# Altium PCB base_power_assy PCB_20171028.PcbDoc
Units mm, origin at the board's own origin, x right, y up, seen from the top; angles counter-clockwise.
Board outline 30 x 27.45 mm, 2 copper layers (Top Layer, Bottom Layer), stack 1 mm thick; 17 components, 7 nets, 46 pads, 128 vias.
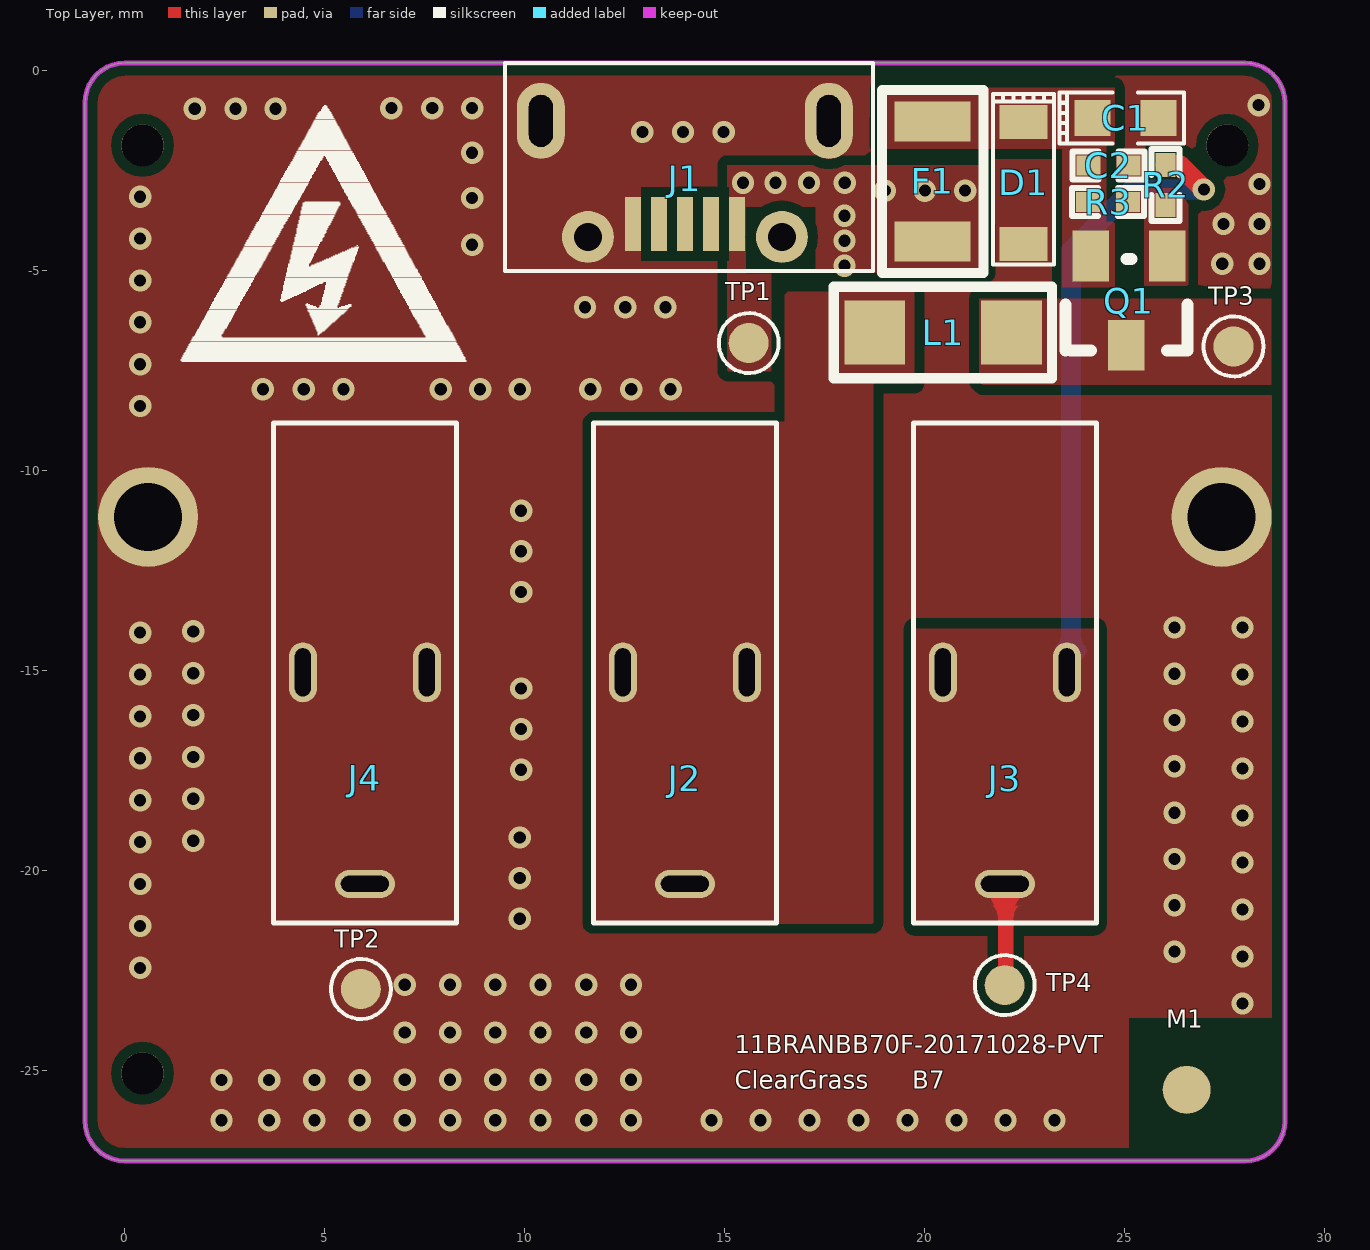
[diagram p0: Top Layer view]
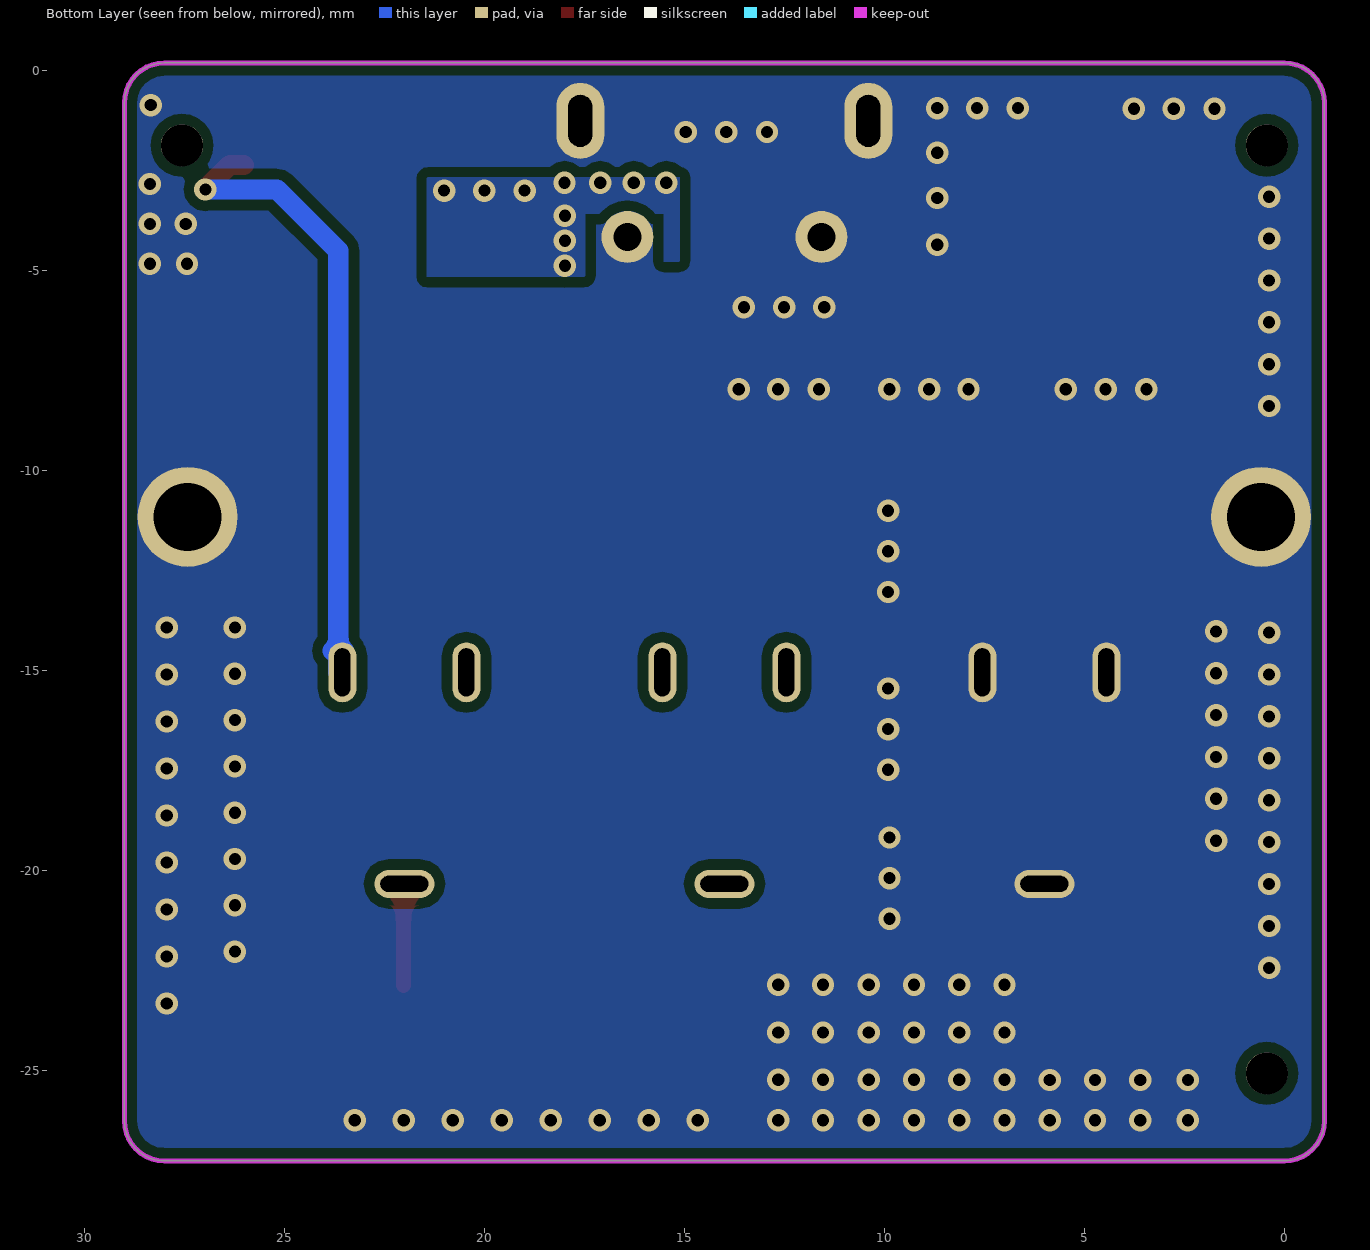
[diagram p1: Bottom Layer view, seen from below]

## Layer stack, top to bottom
Top Solder: solder mask 0.0102, Solder Resist, Dk 3.5
Top Layer: signal copper 0.0356
Dielectric1: core 0.929, FR-4, Dk 4.8
Bottom Layer: signal copper 0.0356
Bottom Solder: solder mask 0.0102, Solder Resist, Dk 3.5

## Board outline
-1,-26.25 ccw(c0,-26.25) 0,-27.25 28,-27.25 ccw(c28,-26.25) 29,-26.25 29,-0.8 ccw(c28,-0.8) 28,0.2 0,0.2 ccw(c0,-0.8) -1,-0.8

## Design rules (kind name [scope] priority, off if disabled: settings)
Clearance [All] p1: gap=0.254
HoleToHoleClearance [All] p1: gap=0 allowstackedmicrovias=TRUE
MinimumSolderMaskSliver [All] p1: minsoldermaskwidth=0
PolygonConnect [All] p1: connectstyle=Direct reliefconductorwidth=1.5 reliefentries=4 polygonreliefangle="90 Angle" airgapwidth=0.254
RoutingVias [All] p1: holewidth=0.711 width=1.27 viastyle="Through Hole" minholewidth=0.711 minwidth=1.27 maxholewidth=0.711 maxwidth=1.27
SilkToSilkClearance [All] p1: silktosilkclearance=0
SilkToSolderMaskClearance SilkscreenOverComponentPads [IsPad] p1: minsilkscreentomaskgap=0 clearancetoexposedcopper=TRUE
SolderMaskExpansion [All] p1: expansion=0.102
Width [All] p1: maxlimit=2.54 minlimit=0.254 preferedwidth=0.254
26 further rules are at their usual default settings.

## Components (designator, comment, footprint, x,y, rotation, side; value= is the part's Value field where it differs from the comment)
C1 "10uF/10V" TAN-0603 25.012,-1.176 r0 top
C2 "0.1uF" 0402C 24.589,-2.361 r180 top
D1 "RSA5M" PDMU 22.465,-2.802 r0 top
F1 "2A" 1206-FUSE 20.193,-2.764 r270 top
J1 "MICRO_USB_B" MICRO-USB-乐沪 14,-2.7 r180 top locked
J2 "Coupler" "COUPLER - 1" 14,-17.73 r180 top locked
J3 "Coupler" "COUPLER - 1" 22,-17.73 r180 top locked
J4 "Coupler" "COUPLER - 1" 6,-17.73 r180 top locked
L1 "B5H DC1206RA601H30T" 1206 20.455,-6.541 r0 top
M1 "MARK" "Mark Point" 26.543,-25.472 r0 top
Q1 "RRR030P03TL" TSMT3 25.101,-5.743 r180 top
R2 "1K/1%" 0402R 26.018,-2.85 r90 top
R3 "100K/1%" 0402R 24.582,-3.273 r0 top
TP1 "TEST" "Test Pad" 15.596,-6.803 r0 top
TP2 "TEST" "Test Pad" 5.898,-22.952 r90 top
TP3 "TEST" "Test Pad" 27.716,-6.888 r90 top
TP4 "TEST" "Test Pad" 21.995,-22.856 r90 top

## Footprints (in the part's own frame and the unit in brackets; to place one, negate y for a bottom-side part, rotate by r counter-clockwise, add the part's x,y. Pads: shape width x height; smd on the part's side, far side on the other; paste and mask are expansions set on the pad)
0402C [mm]
  rect 0.6x0.5 smd: 1(-0.5,0) 2(0.5,0)
  silkscreen extent -0.9,-0.35 0.9,0.35, body extent -0.51,-0.25 0.51,0.25, height 0.5
0402R [mm]
  rect 0.6x0.5 smd: 1(-0.5,0) 2(0.5,0)
  silkscreen extent -0.9,-0.35 0.9,0.35, body extent -0.51,-0.25 0.51,0.25, height 0.5
1206 [mm]
  rect 1.52x1.6 smd: 1(1.71,0) 2(-1.71,0)
  silkscreen extent -2.73,-1.14 2.73,1.14, body extent -2.57,-0.9 2.57,0.9, height 0.9
1206-FUSE [mm]
  rect 1x1.9 smd: 1(1.5,0) 2(-1.5,0)
  silkscreen extent -2.29,-1.27 2.29,1.27, body extent -2.43,-1.2 2.48,1.2, height 1.4
"COUPLER - 1" [mm]
  oval 0.7x1.5 hole 0.4 slot 1.2 at 90 deg: 1(-1.55,-2.695) 1(1.55,-2.695)
  oval 1.5x0.7 hole 0.4 slot 1.2 at 0 deg: 1(0,2.595)
  silkscreen extent -2.29,-8.92 2.29,3.58, body extent -2.33,-8.93 2.2,3.52, height 4.67
"Mark Point" [mm]
  round 1.2 smd: 4(0,0)
  round 2.4 on Top Solder: 5(0,0)
MICRO-USB-乐沪 [mm]
  rect 0.4x1.35 smd: 1(-1.3,1.125) 2(-0.65,1.125) 3(0,1.125) 4(0.65,1.125) 5(1.3,1.125)
  round 1.3 hole 0.7: 6(-2.425,1.45) 7(2.425,1.45)
  oval 1.2x1.9 hole 0.6 slot 1.3 at 90 deg: 8(-3.6,-1.45) 9(3.6,-1.45)
  silkscreen extent -4.7,-2.9 4.5,2.3, body extent -4.71,-4.34 4.46,1.9, height 1.85
PDMU [mm]
  rect 1.2x0.85 smd: 1(0,1.525) 2(0,-1.525)
  silkscreen extent -0.76,-2.03 0.76,2.22, body extent -0.7,-2.05 0.7,2.05, height 0.9
TAN-0603 [mm]
  rect 0.9x0.9 smd: 1(-0.826,0) 2(0.826,0)
  silkscreen extent -1.65,-0.64 1.46,0.64, body extent -1.38,-0.55 1.38,0.55, height 0.9
"Test Pad" [mm]
  round 1 smd: 1(0,0)
  silkscreen extent -0.75,-0.75 0.75,0.75, body extent -0.6,-0.6 0.6,0.6, height 0.1
TSMT3 [mil]
  rect 36x50 smd: 1(-37.5,-44) 2(37.5,-44) 3(2.5,44)
  silkscreen extent -58,-41 62,49, body extent -60,-73 60,73, height 39

## Part data
C1: library part Capacitor
D1: library part ESD_1, "厂?"
F1: library part FUSE2, "厂?"
J1: library part USB_
J2 J3 J4: "厂?"
L1: library part CHOKE, "厂?"
M1: library part PAD1, "None"
Q1: library part PMOS, "厂?"
R2 R3: library part RES, "厂家"
TP1 TP2 TP3 TP4: "Test Point"

## Free pads (board coordinates)
  round 1.05 hole 1.05 unplated mask+0: 0(0.44,-1.86) 3(0.44,-25.06) O(27.56,-1.86)
  round 2.5 hole 1.7: 1(0.58,-11.15) 2(27.42,-11.15)

## Via types
v1: diameter 0.559, hole 0.305, Top Layer to Bottom Layer, tented both sides, 128 vias

## Nets (pads, with @x,y where several pads share a name; then routed paths per layer and width w, separated by ;. In a path a pad name is that pad's centre, name@x,y a point inside that pad or via, vN(x,y) a via of type N, cw(c..) or ccw(c..) an arc to the next point about the centre after c; other vN are vias at no path point)
ADAPTER_5V: C1.1 C2.2 D1.1 F1.2 Q1.2 R3.1
GND: C1.2 C2.1 D1.2 J1.5 J1.6 J1.7 J1.8 J1.9 J4.1 pad.1 pad.2 TP2.1
  other v1: 2.413,-26.234 3.605,-26.234 4.736,-26.234 5.867,-26.234 6.998,-26.234 8.129,-26.234 9.26,-26.234 10.391,-26.234 11.535,-26.234 12.653,-26.234 14.665,-26.234 15.89,-26.234 17.115,-26.234 18.34,-26.234 19.565,-26.234 20.791,-26.234 22.016,-26.234 23.241,-26.234 2.413,-25.228 3.605,-25.228 4.736,-25.228 5.867,-25.228 6.998,-25.22 8.129,-25.22 9.26,-25.22 10.391,-25.22 11.535,-25.22 12.653,-25.22 6.998,-24.041 8.129,-24.041 9.26,-24.041 10.391,-24.041 11.535,-24.041 12.653,-24.041 27.94,-23.313 6.998,-22.844 8.129,-22.844 9.26,-22.844 10.391,-22.844 11.535,-22.844 12.653,-22.844 0.381,-22.424 27.94,-22.138 26.238,-22.018 0.381,-21.376 9.873,-21.196 27.94,-20.963 26.238,-20.86 0.381,-20.328 9.873,-20.18 27.94,-19.789 26.238,-19.703 0.381,-19.281 1.706,-19.244 9.873,-19.164 27.94,-18.614 26.238,-18.545 0.381,-18.233 1.706,-18.197 9.906,-17.471 27.94,-17.439 26.238,-17.388 0.381,-17.185 1.706,-17.151 9.906,-16.455 27.94,-16.264 26.238,-16.23 0.381,-16.137 1.706,-16.104 9.906,-15.439 0.381,-15.09 27.94,-15.09 1.706,-15.058 26.238,-15.073 0.381,-14.042 1.706,-14.011 26.238,-13.915 27.94,-13.915 9.906,-13.026 9.906,-12.01 9.906,-10.994 0.381,-8.378 3.45,-7.958 4.469,-7.958 5.465,-7.958 7.897,-7.958 8.881,-7.958 9.874,-7.958 11.637,-7.958 12.657,-7.958 13.643,-7.958 0.381,-7.331 0.381,-6.285 11.502,-5.908 12.507,-5.908 13.512,-5.908 0.381,-5.238 27.435,-4.82 28.363,-4.82 8.68,-4.344 0.381,-4.192 27.466,-3.825 28.363,-3.825 8.68,-3.177 0.381,-3.145 28.363,-2.829 8.68,-2.044 12.936,-1.526 13.952,-1.526 14.968,-1.526 1.748,-0.944 2.767,-0.944 3.763,-0.944 6.663,-0.931 7.682,-0.931 8.68,-0.931 28.343,-0.855
LOAD_5V: L1.1 Q1.3 TP3.1
NetF1_1: F1.1 J1.1 TP1.1
  other v1: 17.988,-4.873 17.988,-4.246 17.988,-3.62 18.994,-2.993 20,-2.993 21.006,-2.993 15.451,-2.794 16.264,-2.794 17.102,-2.794 17.996,-2.794
NetJ2_1: J2.1 L1.2
NetQ1_1: Q1.1 R2.1 R3.2
TEST_POWER: J3.1 R2.2 TP4.1 | length 46.9
  Top Layer w0.381: J3.1@21.851,-20.637 cw(c21.65,-20.921) 21.998,-20.923 ; TP4.1@22.022,-22.856 22.022,-20.447 J3.1@22,-20.425 ; J3.1@22.148,-20.638 ccw(c22.345,-20.924) 21.998,-20.923 ; J3.1@21.749,-20.492 21.998,-20.923 ; J3.1@21.749,-20.492 21.998,-20.923 ; J3.1@21.749,-20.492 21.998,-20.923 ; J3.1@21.749,-20.492 21.998,-20.923 ; J3.1@21.749,-20.492 21.998,-20.923 ; J3.1@21.749,-20.492 21.998,-20.923 ; 21.998,-20.923 J3.1@22,-20.425 ; 21.998,-20.923 J3.1@22.25,-20.494 ; 21.998,-20.923 J3.1@22,-20.425 ; 21.998,-20.923 J3.1@22.25,-20.494 ; 21.998,-20.923 J3.1@22,-20.425 ; 21.998,-20.923 J3.1@22.25,-20.494 ; 21.998,-20.923 J3.1@22,-20.425 ; 21.998,-20.923 J3.1@22.25,-20.494 ; 21.998,-20.923 J3.1@22,-20.425 ; 21.998,-20.923 J3.1@22.25,-20.494 ; 21.998,-20.923 J3.1@22.25,-20.494 ; 21.998,-20.923 J3.1@22,-20.425 ; J3.1@21.817,-20.608 cw(c21.321,-21.104) 22.022,-21.104 ccw(c21.321,-21.104) J3.1@21.817,-20.608 ; 22.022,-20.999 cw(c22.574,-20.999) 22.183,-20.608 ccw(c22.574,-20.999) 22.022,-20.999
  Top Layer w0.508: R2.2 26.361,-2.35 ; R2.2 26.361,-2.35 ; R2.2 26.361,-2.35 ; R2.2 26.361,-2.35 ; 26.361,-2.35 v1(26.974,-2.964) ; 26.361,-2.35 v1(26.974,-2.964) ; 26.361,-2.35 v1(26.974,-2.964) ; 26.361,-2.35 v1(26.974,-2.964)
  Bottom Layer w0.508: J3.1@23.65,-15.035 23.65,-4.499 25.186,-2.964 ; J3.1@23.511,-14.496 ccw(c23.177,-14.162) 23.65,-14.162 ; J3.1@23.511,-14.496 ccw(c23.177,-14.162) 23.65,-14.162 ; J3.1@23.511,-14.496 ccw(c23.177,-14.162) 23.65,-14.162 ; J3.1@23.65,-14.635 23.65,-12.661 ; J3.1@23.65,-14.635 23.65,-12.661 ; J3.1@23.65,-14.635 23.65,-12.661 ; 23.65,-14.162 ccw(c24.123,-14.162) J3.1@23.789,-14.496 ; 23.65,-14.162 ccw(c24.123,-14.162) J3.1@23.789,-14.496 ; 23.65,-14.162 ccw(c24.123,-14.162) J3.1@23.789,-14.496 ; 25.186,-2.964 v1(26.974,-2.964) ; 25.186,-2.964 v1(26.974,-2.964) ; 25.186,-2.964 v1(26.974,-2.964) ; 25.186,-2.964 v1(26.974,-2.964)
pads on no net: J1.2 J1.3 J1.4 M1.4 M1.5

## Polygon pours and split planes (outlines as drawn)
TEST_POWER on Top Layer "Bottom Layer-No Net" (solid, remove dead copper, pour order 16): 19.71,-13.94 24.282,-13.94 24.282,-21.327 24.257,-21.342 24.232,-21.357 19.736,-21.357 19.736,-13.955 19.71,-13.94
NetF1_1 on Top Layer "Bottom Layer-No Net" (solid, remove dead copper, pour order 17): 21.488,-3.851 21.488,-2.364 20.422,-2.364 15.062,-2.364 15.062,-4.355 15.062,-6.028 15.062,-7.381 15.062,-7.488 15.088,-7.514 16.154,-7.514 16.154,-5.072 15.519,-5.072 15.519,-3.399 16.459,-3.399 17.17,-3.399 17.272,-3.399 17.272,-5.045 20.599,-5.045 21.514,-5.045 21.514,-3.293 21.514,-2.364
ADAPTER_5V on Top Layer "Bottom Layer-No Net" (solid, remove dead copper, pour order 12): 18.872,-1.94 18.878,-1.946 23.43,-1.946 23.43,-5.42 23.424,-5.426 23.442,-5.408 23.985,-5.408 24.741,-5.408 24.765,-5.432 24.747,-5.414 24.747,-3.525 24.747,-0.427 24.741,-0.421 21.494,-0.421 18.908,-0.421 18.878,-0.451
NetQ1_1 on Top Layer "Bottom Layer-No Net" (solid, remove dead copper, pour order 13): 24.745,-3.654 24.765,-3.635 25.488,-3.635 25.488,-5.362 25.481,-5.369 26.551,-5.369 26.558,-5.362 26.579,-5.342 26.579,-2.928 24.756,-2.928 24.745,-2.918
LOAD_5V on Top Layer "Bottom Layer-No Net" (solid, remove dead copper, pour order 14): 21.353,-5.678 21.367,-5.691 28.488,-5.691 28.638,-5.691 28.659,-5.671 28.659,-6.082 28.659,-7.83 28.673,-7.844 28.672,-7.843 26.856,-7.843 21.365,-7.843 21.353,-7.831
NetJ2_1 on Top Layer "Bottom Layer-No Net" (solid, remove dead copper, pour order 15): 17.751,-5.523 17.758,-5.516 19.735,-5.516 19.735,-7.806 19.736,-7.807 19.312,-7.807 18.712,-7.807 18.709,-7.81 18.709,-8.337 18.709,-21.309 18.694,-21.324 18.687,-21.318 14.444,-21.318 11.718,-21.318 11.678,-21.357 11.691,-21.344 11.691,-15.42 11.691,-8.821 11.711,-8.801 11.737,-8.775 16.496,-8.775 16.496,-5.525 16.509,-5.512
GND on Top Layer "Bottom Layer-No Net" (solid, remove dead copper, pour order 10): -4.603,3.226 32.822,3.226 33.255,3.66 33.015,3.419 33.015,-32.465 -10.143,-32.465 -10.865,-33.188
NetF1_1 on Bottom Layer "Bottom Layer-No Net" (solid, remove dead copper, pour order 18): 15.519,-4.771 15.088,-4.771 15.113,-4.746 15.113,-2.663 21.412,-2.663 21.438,-2.688 21.438,-5.152 17.501,-5.152 17.475,-5.127 17.475,-3.577 15.519,-3.577 15.519,-4.746 15.519,-4.771
GND on Bottom Layer "Bottom Layer-No Net" (solid, remove dead copper, pour order 11): -2.918,2.648 -2.003,3.563 29.065,3.563 29.547,3.563 32.196,0.914 31.425,0.144 31.425,-28.997 -5.133,-28.997 -6.338,-30.201

## Keep-outs
Keep-Out Layer:
  the board outline again, w0.127

## Other copper
Top Layer:
  pour cut-out: 25.093,-23.667 25.101,-23.675 29.987,-23.675 29.987,-26.797 28.832,-27.952 25.093,-27.952

## Silkscreen, mask and mechanical layers (free items; w line width, h text height)
Top Overlay:
  drawing of 614 lines, arcs and shapes, not listed
  text "11BRANBB70F-20171028-PVT" at 15.24,-24.71 h0.76
  text "ClearGrass" at 15.24,-25.599 h0.76
  text "B7" at 19.685,-25.599 h0.76